# EAGLE board project (EAGLE 9.7.0)
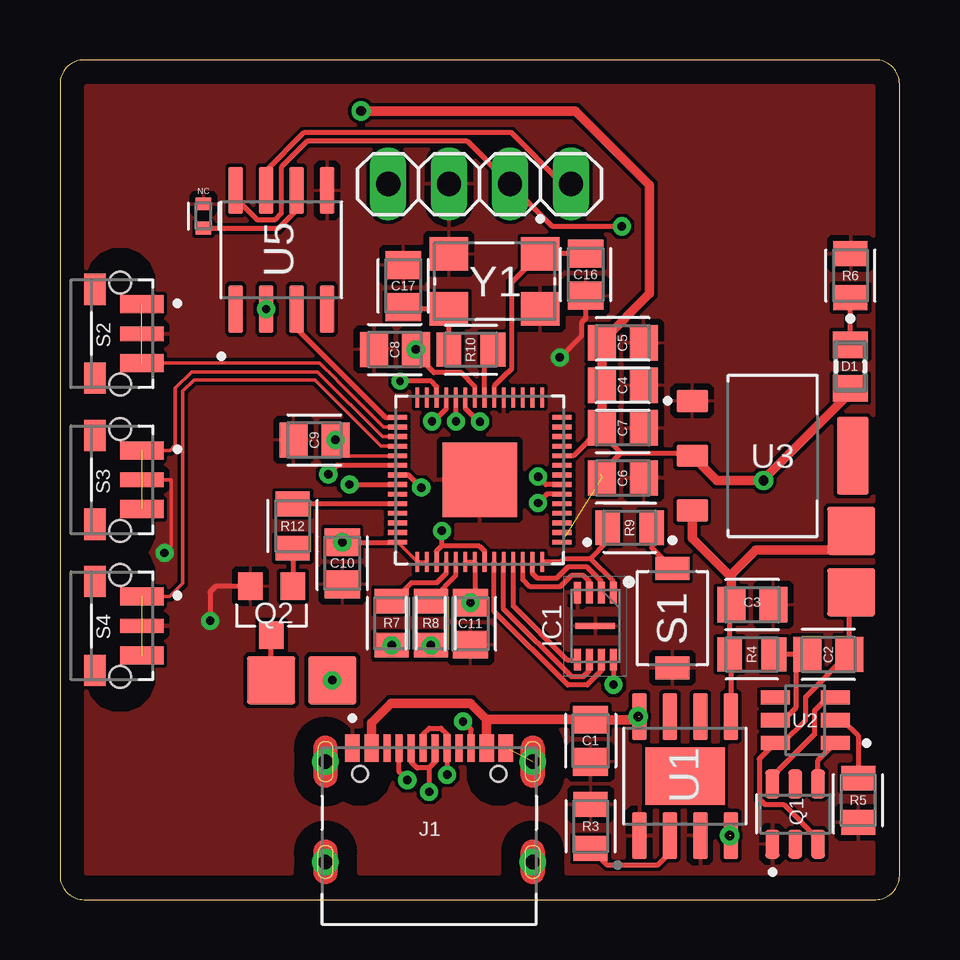
[diagram p0: board, top side]
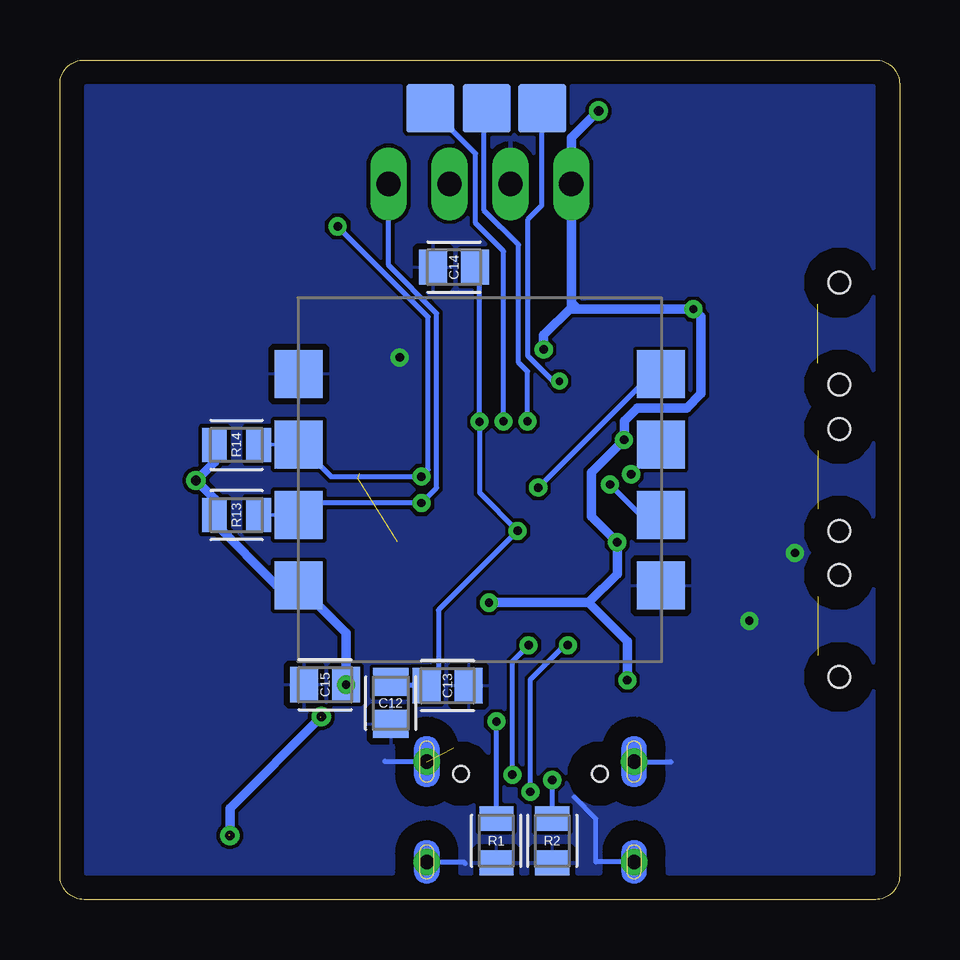
[diagram p1: board, bottom side, seen from below]

Size 35 x 35 mm. Coordinates in mm from the lower left corner, seen from the top.
Outline: 19.41,5.2 19.41,6.3 19.41,6.33 19.41,6.35 19.42,6.38 19.43,6.4 19.44,6.43 19.45,6.45 19.46,6.47 19.48,6.49 19.5,6.51 19.52,6.53 19.54,6.55 19.56,6.56 19.58,6.57 19.61,6.58 19.63,6.59 19.66,6.6 19.68,6.6 19.71,6.6 19.74,6.6 19.76,6.6 19.79,6.59 19.81,6.58 19.84,6.57 19.86,6.56 19.88,6.55 19.9,6.53 19.92,6.51 19.94,6.49 19.96,6.47 19.97,6.45 19.98,6.43 19.99,6.4 20,6.38 20,6.35 20.01,6.33 20.01,6.3 20.01,5.2 20.01,5.17 20,5.15 20,5.12 19.99,5.1 19.98,5.07 19.97,5.05 19.96,5.03 19.94,5.01 19.92,4.99 19.9,4.97 19.88,4.95 19.86,4.94 19.84,4.93 19.81,4.92 19.79,4.91 19.76,4.9 19.74,4.9 19.71,4.9 19.68,4.9 19.66,4.9 19.63,4.91 19.61,4.92 19.58,4.93 19.56,4.94 19.54,4.95 19.52,4.97 19.5,4.99 19.48,5.01 19.46,5.03 19.45,5.05 19.44,5.07 19.43,5.1 19.42,5.12 19.41,5.15 19.41,5.17 19.41,5.2
Outline: 10.77,5.2 10.77,6.3 10.77,6.33 10.78,6.35 10.78,6.38 10.79,6.4 10.8,6.43 10.81,6.45 10.82,6.47 10.84,6.49 10.86,6.51 10.88,6.53 10.9,6.55 10.92,6.56 10.94,6.57 10.97,6.58 10.99,6.59 11.02,6.6 11.04,6.6 11.07,6.6 11.1,6.6 11.12,6.6 11.15,6.59 11.17,6.58 11.2,6.57 11.22,6.56 11.24,6.55 11.26,6.53 11.28,6.51 11.3,6.49 11.32,6.47 11.33,6.45 11.34,6.43 11.35,6.4 11.36,6.38 11.37,6.35 11.37,6.33 11.37,6.3 11.37,5.2 11.37,5.17 11.37,5.15 11.36,5.12 11.35,5.1 11.34,5.07 11.33,5.05 11.32,5.03 11.3,5.01 11.28,4.99 11.26,4.97 11.24,4.95 11.22,4.94 11.2,4.93 11.17,4.92 11.15,4.91 11.12,4.9 11.1,4.9 11.07,4.9 11.04,4.9 11.02,4.9 10.99,4.91 10.97,4.92 10.94,4.93 10.92,4.94 10.9,4.95 10.88,4.97 10.86,4.99 10.84,5.01 10.82,5.03 10.81,5.05 10.8,5.07 10.79,5.1 10.78,5.12 10.78,5.15 10.77,5.17 10.77,5.2
Outline: 19.41,1.17 19.41,1.97 19.41,2 19.41,2.02 19.42,2.05 19.43,2.07 19.44,2.1 19.45,2.12 19.46,2.14 19.48,2.16 19.5,2.18 19.52,2.2 19.54,2.22 19.56,2.23 19.58,2.24 19.61,2.25 19.63,2.26 19.66,2.27 19.68,2.27 19.71,2.27 19.74,2.27 19.76,2.27 19.79,2.26 19.81,2.25 19.84,2.24 19.86,2.23 19.88,2.22 19.9,2.2 19.92,2.18 19.94,2.16 19.96,2.14 19.97,2.12 19.98,2.1 19.99,2.07 20,2.05 20,2.02 20.01,2 20.01,1.97 20.01,1.17 20.01,1.14 20,1.12 20,1.09 19.99,1.07 19.98,1.04 19.97,1.02 19.96,1 19.94,0.98 19.92,0.96 19.9,0.94 19.88,0.92 19.86,0.91 19.84,0.9 19.81,0.89 19.79,0.88 19.76,0.88 19.74,0.87 19.71,0.87 19.68,0.87 19.66,0.88 19.63,0.88 19.61,0.89 19.58,0.9 19.56,0.91 19.54,0.92 19.52,0.94 19.5,0.96 19.48,0.98 19.46,1 19.45,1.02 19.44,1.04 19.43,1.07 19.42,1.09 19.41,1.12 19.41,1.14 19.41,1.17
Outline: 10.77,1.17 10.77,1.97 10.77,2 10.78,2.02 10.78,2.05 10.79,2.07 10.8,2.1 10.81,2.12 10.82,2.14 10.84,2.16 10.86,2.18 10.88,2.2 10.9,2.22 10.92,2.23 10.94,2.24 10.97,2.25 10.99,2.26 11.02,2.27 11.04,2.27 11.07,2.27 11.1,2.27 11.12,2.27 11.15,2.26 11.17,2.25 11.2,2.24 11.22,2.23 11.24,2.22 11.26,2.2 11.28,2.18 11.3,2.16 11.32,2.14 11.33,2.12 11.34,2.1 11.35,2.07 11.36,2.05 11.37,2.02 11.37,2 11.37,1.97 11.37,1.17 11.37,1.14 11.37,1.12 11.36,1.09 11.35,1.07 11.34,1.04 11.33,1.02 11.32,1 11.3,0.98 11.28,0.96 11.26,0.94 11.24,0.92 11.22,0.91 11.2,0.9 11.17,0.89 11.15,0.88 11.12,0.88 11.1,0.87 11.07,0.87 11.04,0.87 11.02,0.88 10.99,0.88 10.97,0.89 10.94,0.9 10.92,0.91 10.9,0.92 10.88,0.94 10.86,0.96 10.84,0.98 10.82,1 10.81,1.02 10.8,1.04 10.79,1.07 10.78,1.09 10.78,1.12 10.77,1.14 10.77,1.17
Outline: 0,34 0,1 arc90 1,0 34,0 arc90 35,1 35,34 arc90 34,35 1,35 arc90 0,34
Copper layers (1*16): Top / Bottom
Stack-up Default Layer Stack: Top SilkScreen Epoxy Ink / Top SolderMask SR:Green 0.0254mm Dk 4.3 / Top Surface Finish Lead-Free 0.02mm / Top CuFoil:007 0.035mm / Dielectric-1 User Defined 1.5mm / Bottom CuFoil:007 0.035mm / Bottom Surface Finish Lead-Free 0.02mm / Bottom SolderMask SR:Green 0.0254mm Dk 4.3 / Bottom SilkScreen Epoxy Ink
Design rules: minimum copper width 6mil, minimum drill size 0.35mm, copper clearance wire_polygon to wire_polygon 6mil, copper clearance wire_polygon to pad_smd 6mil, copper clearance wire_polygon to via 6mil, copper clearance pad_smd to pad_smd 6mil, copper clearance pad_smd to via 6mil, copper clearance via to via 6mil, copper clearance smd to pad (same net) 6mil, copper clearance smd to via (same net) 6mil, copper clearance smd to smd (same net) 6mil, dimension clearance 40mil, via restrict clearance 0mil, restrict clearance 0mil, drill distance 6mil, keepout clearance 0mil

## Footprints (pad centres in the part's own frame; a part is rotated, then mirrored left to right if it is on the bottom)
SOLDER_PAD_2MM = smd 2 x 2: SP 0,0
CAPC2012X110 = smd 1.165 x 1.465: 1 -0.875,0; 2 0.875,0
LEDC2012X70N = smd 1.1 x 1.45: A 0.9,0; C -0.9,0
SON50P300X200X60-9N = smd 0.9 x 0.3: 1 -1.4,0.75; 2 -1.4,0.25; 3 -1.4,-0.25; 4 -1.4,-0.75; 5 1.4,-0.75; 6 1.4,-0.25; 7 1.4,0.25; 8 1.4,0.75 | smd 0.25 x 1.65: 9 0,0
TYPE-C(16PIN) = smd 0.6 x 1.15: A1_B12 -3.2,3.67; A4_B9 -2.4,3.67; B1_A12 3.2,3.67; B4_A9 2.4,3.67 | smd 0.3 x 1.15: A5 -1.25,3.67; A6 -0.25,3.67; A7 0.25,3.67; A8 1.25,3.67; B5 1.75,3.67; B6 0.75,3.67; B7 -0.75,3.67; B8 -1.75,3.67 | drill 0.6 pad 1: SH1 -4.32,-1.075; SH2 4.32,-1.075; SH3 -4.32,3.105; SH4 4.32,3.105 | hole 0.65: -2.89,2.605; 2.89,2.605
1X04 = drill 1.016 long: 1 -3.81,0; 2 -1.27,0; 3 1.27,0; 4 3.81,0
RESC1005X40 = smd 0.535 x 0.644: 1 -0.507,0; 2 0.507,0
SOT95P280X145-6N = smd 1.21 x 0.59: 1 -1.255,0.95; 2 -1.255,0; 3 -1.255,-0.95; 4 1.255,-0.95; 5 1.255,0; 6 1.255,0.95
SOT-23 = smd 1.016 x 1.143: 1 -0.889,-1.016; 2 0.889,-1.016; 3 0,1.016
RESC2012X65 = smd 1.031 x 1.42: 1 -0.919,0; 2 0.919,0
PUSH-4X3 = smd 0.95 x 1.4: 1 -2.075,0; 2 2.075,0
SW_SKRTLAE010 = smd 0.75 x 1.8: 1 -1.225,0.9; 3 1.225,0.9 | smd 0.6 x 1.8: 2 0,0.9 | smd 1.3 x 0.9: S1 -1.85,-1.05; S2 1.85,-1.05 | hole 0.9: -2.125,0; 2.125,0
SOP127P600X175-9N = smd 1.97 x 0.6: 1 -2.475,1.905; 2 -2.475,0.635; 3 -2.475,-0.635; 4 -2.475,-1.905; 5 2.475,-1.905; 6 2.475,-0.635; 7 2.475,0.635; 8 2.475,1.905 | smd 2.413 x 3.302: 9 0,0
AMS1117_3.3 = smd 0.93 x 1.31: 1 -2.29,-3.345; 2 0,-3.345; 3 2.29,-3.345 | smd 3.24 x 1.31: 4 0,3.345
QFN40P700X700X90-57N = smd 0.84 x 0.2: 1 -3.435,2.6; 2 -3.435,2.2; 3 -3.435,1.8; 4 -3.435,1.4; 5 -3.435,1; 6 -3.435,0.6; 7 -3.435,0.2; 8 -3.435,-0.2; 9 -3.435,-0.6; 10 -3.435,-1; 11 -3.435,-1.4; 12 -3.435,-1.8; 13 -3.435,-2.2; 14 -3.435,-2.6; 29 3.435,-2.6; 30 3.435,-2.2; 31 3.435,-1.8; 32 3.435,-1.4; 33 3.435,-1; 34 3.435,-0.6; 35 3.435,-0.2; 36 3.435,0.2; 37 3.435,0.6; 38 3.435,1; 39 3.435,1.4; 40 3.435,1.8; 41 3.435,2.2; 42 3.435,2.6 | smd 0.2 x 0.84: 15 -2.6,-3.435; 16 -2.2,-3.435; 17 -1.8,-3.435; 18 -1.4,-3.435; 19 -1,-3.435; 20 -0.6,-3.435; 21 -0.2,-3.435; 22 0.2,-3.435; 23 0.6,-3.435; 24 1,-3.435; 25 1.4,-3.435; 26 1.8,-3.435; 27 2.2,-3.435; 28 2.6,-3.435; 43 2.6,3.435; 44 2.2,3.435; 45 1.8,3.435; 46 1.4,3.435; 47 1,3.435; 48 0.6,3.435; 49 0.2,3.435; 50 -0.2,3.435; 51 -0.6,3.435; 52 -1,3.435; 53 -1.4,3.435; 54 -1.8,3.435; 55 -2.2,3.435; 56 -2.6,3.435 | smd 3.1 x 3.1: 57 0,0
SOIC127P600X175-8N = smd 1.97 x 0.59: 1 -2.475,1.905; 2 -2.475,0.635; 3 -2.475,-0.635; 4 -2.475,-1.905; 5 2.475,-1.905; 6 2.475,-0.635; 7 2.475,0.635; 8 2.475,1.905
MAX30100 = smd 2 x 2: GND1 7.544,-4.41; GND2 -7.544,4.416; INT -7.544,-4.404; IR0 -7.544,-1.464; RD -7.544,1.476; SCL 7.544,-1.47; SDA 7.544,1.47; VIN 7.544,4.41
RES-12MHZ = smd 1.4 x 1.6: 1 -1.15,1.9; 2 -1.15,-1.9; 3 1.15,-1.9; 4 1.15,1.9

## Placement (x,y rotation side)
B+  SOLDER_PAD_2MM  [SOLDER_PAD_2MM]  32.98,15.37 0 top
B-  SOLDER_PAD_2MM  [SOLDER_PAD_2MM]  32.98,12.81 0 top
C1  0.1uF  [CAPC2012X110]  22.12,6.62 90 top
C2  0.1uF  [CAPC2012X110]  32.03,10.22 0 top
C3  10uF  [CAPC2012X110]  28.86,12.29 0 top
C4  10uF  [CAPC2012X110]  23.46,21.44 0 top
C5  1uF  [CAPC2012X110]  23.46,23.21 0 top
C6  100nF  [CAPC2012X110]  23.46,17.57 0 top
C7  100nF  [CAPC2012X110]  23.46,19.67 0 top
C8  100nF  [CAPC2012X110]  13.96,22.93 180 top
C9  100nF  [CAPC2012X110]  10.61,19.16 180 top
C10  100nF  [CAPC2012X110]  11.77,14.02 270 top
C11  100nF  [CAPC2012X110]  17.11,11.5 270 top
C12  1uF  [CAPC2012X110]  21.21,8.19 270 bottom
C13  100nF  [CAPC2012X110]  18.84,8.92 0 bottom
C14  100nF  [CAPC2012X110]  18.57,26.36 180 bottom
C15  100nF  [CAPC2012X110]  23.95,8.96 180 bottom
C16  1uF  [CAPC2012X110]  21.91,26.05 270 top
C17  1uF  [CAPC2012X110]  14.31,25.58 270 top
D1  LED0805  [LEDC2012X70N]  32.95,22.22 270 top
IC1  W25Q16JVUXIQ  [SON50P300X200X60-9N]  22.32,11.4 270 top
J1  TYPE-C(16PIN)"  [TYPE-C(16PIN)]  15.39,2.64 0 top
JP1  PINHD-1X4  [1X04]  17.49,29.83 0 top
NC  [RESC1005X40]  5.98,28.49 90 top
Q1  FS8205  [SOT95P280X145-6N]  30.65,3.57 90 top
Q2  SMD-TRANSISTORS-NPN-25V-500MW(SOT-23)  [SOT-23]  8.82,12.04 180 top
R1  5.1K  [RESC2012X65]  16.81,2.45 270 bottom
R2  5.1k  [RESC2012X65]  14.48,2.45 90 bottom
R3  1.2K  [RESC2012X65]  22.12,3.05 90 top
R4  100  [RESC2012X65]  28.84,10.22 0 top
R5  1K  [RESC2012X65]  33.27,4.14 270 top
R6  100  [RESC2012X65]  32.95,26.01 270 top
R7  100  [RESC2012X65]  13.83,11.52 90 top
R8  100  [RESC2012X65]  15.46,11.52 270 top
R9  100  [RESC2012X65]  23.75,15.5 180 top
R10  1K  [RESC2012X65]  17.13,22.92 180 top
R12  330  [RESC2012X65]  9.7,15.57 270 top
R13  4.7K  [RESC2012X65]  27.64,16.03 0 bottom
R14  4.7K  [RESC2012X65]  27.64,18.95 180 bottom
S1  PUSH-4X3  [PUSH-4X3]  25.53,11.73 270 top
S2  SKRTLAE010  [SW_SKRTLAE010]  2.52,23.59 270 top
S3  SKRTLAE010  [SW_SKRTLAE010]  2.52,17.5 270 top
S4  SKRTLAE010  [SW_SKRTLAE010]  2.52,11.41 270 top
SP1  SOLDER_PAD_2MM  [SOLDER_PAD_2MM]  14.9,32.98 180 bottom
SP2  SOLDER_PAD_2MM  [SOLDER_PAD_2MM]  19.56,32.98 180 bottom
SP3  SOLDER_PAD_2MM  [SOLDER_PAD_2MM]  17.21,32.98 180 bottom
SP4  SOLDER_PAD_2MM  [SOLDER_PAD_2MM]  8.8,9.14 0 top
SP5  SOLDER_PAD_2MM  [SOLDER_PAD_2MM]  11.35,9.14 0 top
U1  TP4056  [SOP127P600X175-9N]  26.06,5.15 90 top
U2  DW01A  [SOT95P280X145-6N]  31.07,7.48 180 top
U3  AMS1117_3.3  [AMS1117_3.3]  29.7,18.5 270 top
U4  RP2040  [QFN40P700X700X90-57N]  17.5,17.5 180 top
U5  DS3231MZ+  [SOIC127P600X175-8N]  9.23,27.09 90 top
U$1  MAX30100MAX30100  [MAX30100]  17.5,17.5 180 bottom
Y1  RES-12MHZ  [RES-12MHZ]  18.11,25.77 270 top

## Library data of the parts
B+ B- SP1-SP5 = SOLDER PAD
C1-C17 = Capacitor; CATEGORY: Capacitor; PACKAGE_SIZE: 0805; PACKAGE_TYPE: Surface Mount; SUBCATEGORY: Ceramic Capacitors; TYPE: MLCC
D1 = LED 0805; AVAILABILITY: In Stock; CHECK_PRICES: https://www.snapeda.com/parts/597-3305-607F/Dialight/view-part/?ref=eda; DESCRIPTION: SMD LED 0805 G 7 | Dialight 597-3305-607F; MF: Dialight; MP: 597-3305-607F; PACKAGE: 0805 Dialight; PRICE: None; PURCHASE-URL: https://www.snapeda.com/api/url_track_click_mouser/?unipart_id=561918&manufacturer=Dialight&part_name=597-3305-607F&search_term=led 0805; SNAPEDA_LINK: https://www.snapeda.com/parts/597-3305-607F/Dialight/view-part/?ref=snap
IC1 = W25Q16JVUXIQ; AVAILABILITY: In Stock; CHECK_PRICES: https://www.snapeda.com/parts/W25Q16JVUXIQ/Winbond/view-part/?ref=eda; DESCRIPTION: NOR Flash Serial (SPI, Dual SPI, Quad SPI) 3V/3.3V 16M-bit 2M x 8 6ns 8-Pin USON EP T/R; MF: Winbond; MP: W25Q16JVUXIQ; PACKAGE: UFDFN-8 Winbond; PRICE: None; SNAPEDA_LINK: https://www.snapeda.com/parts/W25Q16JVUXIQ/Winbond/view-part/?ref=snap
J1 = TYPE-C USB; AVAILABILITY: Not in stock; CHECK_PRICES: https://www.snapeda.com/parts/TYPE-C%2016PIN%202MD%20(073)/Shouhan/view-part/?ref=eda; DESCRIPTION: DC-5V 5A Type C USB; MF: Shouhan; MP: TYPE-C(16PIN); PACKAGE: Package; PRICE: None; SNAPEDA_LINK: https://www.snapeda.com/parts/TYPE-C%2016PIN%202MD%20(073)/Shouhan/view-part/?ref=snap
JP1 = Connector; CATEGORY: Connectors; DESCRIPTION: Header-Straight-4 Position; PACKAGE_TYPE: Through Hole; PITCH: 0.100" (2.54mm); SUBCATEGORY: Headers; TYPE: Male Pins
NC = Resistor; CATEGORY: Resistors; DESCRIPTION: Chip Resistor 1.05 X 0.54 X 0.40 mm body 0402(1005-METRIC) Package; PACKAGE_SIZE: 0402; PACKAGE_TYPE: Surface Mount
Q1 = FS8205; AVAILABILITY: In Stock; CHECK_PRICES: https://www.snapeda.com/parts/FS8205/Fortune+Semiconductor/view-part/?ref=eda; DESCRIPTION: Dual N-Channel Enhancement Mode Power MOSFET; MF: Fortune Semiconductor; MP: FS8205; PACKAGE: Package; PRICE: None; SNAPEDA_LINK: https://www.snapeda.com/parts/FS8205/Fortune+Semiconductor/view-part/?ref=snap
Q2 = S8050; AVAILABILITY: In Stock; CHECK_PRICES: https://www.snapeda.com/parts/S8050/MDD/view-part/?ref=eda; DESCRIPTION: Bipolar (BJT) Transistor NPN 25 V 500 mA 150MHz 300 mW Surface Mount SOT-23; MF: MDD; MP: S8050; PACKAGE: None; PRICE: None; SNAPEDA_LINK: https://www.snapeda.com/parts/S8050/MDD/view-part/?ref=snap
R1-R10 R12-R14 = Resistor; CATEGORY: Resistors; DESCRIPTION: Chip Resistor 2.00 X 1.25 X 0.65 mm body 0805(2012-METRIC) Package; PACKAGE_SIZE: 0805; PACKAGE_TYPE: Surface Mount
S1 = PUSH 4x3mm; AVAILABILITY: In Stock; CHECK_PRICES: https://www.snapeda.com/parts/TL1015AF160QG/E-Switch/view-part/?ref=eda; DESCRIPTION: Tactile Switch SPST-NO Top Actuated Surface Mount; MF: E-Switch; MP: TL1015AF160QG; PACKAGE: None; PRICE: None; SNAPEDA_LINK: https://www.snapeda.com/parts/TL1015AF160QG/E-Switch/view-part/?ref=snap
S2-S4 = PUSH LATERAL; AVAILABILITY: In Stock; CHECK_PRICES: https://www.snapeda.com/parts/SKRTLAE010/ALPS/view-part/?ref=eda; DESCRIPTION: Switch Tactile N.O. SPST Round Button J-Bend 0.05A 12VDC 1.6N SMD Embossed Tape; MF: ALPS; MP: SKRTLAE010; PACKAGE: None; PRICE: None; PURCHASE-URL: https://www.snapeda.com/api/url_track_click_mouser/?unipart_id=696622&manufacturer=ALPS&part_name=SKRTLAE010&search_term=alps skrp tactile switch; SNAPEDA_LINK: https://www.snapeda.com/parts/SKRTLAE010/ALPS/view-part/?ref=snap
U1 = TP4056; AVAILABILITY: Not in stock; CHECK_PRICES: https://www.snapeda.com/parts/TP4056/NanJing+Top+Power+ASIC+Corp./view-part/?ref=eda; DESCRIPTION: Complete single cell Li-Ion battery with a constant current / constant voltage linear charger; MF: NanJing Top Power ASIC Corp.; MP: TP4056; PACKAGE: Package; PRICE: None; SNAPEDA_LINK: https://www.snapeda.com/parts/TP4056/NanJing+Top+Power+ASIC+Corp./view-part/?ref=snap
U2 = DW01A; AVAILABILITY: Not in stock; CHECK_PRICES: https://www.snapeda.com/parts/DW01A/Fortune+Semiconductor/view-part/?ref=eda; DESCRIPTION: One Cell Lithium-ion/Polymer Battery Protection IC; MF: Fortune Semiconductor; MP: DW01A; PACKAGE: SOT-23-6 Fortune Semiconductor; PRICE: None; SNAPEDA_LINK: https://www.snapeda.com/parts/DW01A/Fortune+Semiconductor/view-part/?ref=snap
U3 = VOL REGS; AVAILABILITY: In Stock; CHECK_PRICES: https://www.snapeda.com/parts/AMS1117-3.3/UMW/view-part/?ref=eda; DESCRIPTION: Linear Voltage Regulator IC Positive Fixed 1 Output 1A SOT-223-3L; MF: UMW; MP: AMS1117-3.3; PACKAGE: SOT-223-3L UMW; PRICE: None; SNAPEDA_LINK: https://www.snapeda.com/parts/AMS1117-3.3/UMW/view-part/?ref=snap
U4 = RP2040; AVAILABILITY: In Stock; CHECK_PRICES: https://www.snapeda.com/parts/RP2040/Raspberry+Pi/view-part/?ref=eda; DESCRIPTION: RP2040 chip for Raspberry Pi Pico - ARM® Cortex®-M0+ MCU 32-Bit; MF: Raspberry Pi; MP: RP2040; PACKAGE: None; PRICE: None; PURCHASE-URL: https://www.snapeda.com/api/url_track_click_mouser/?unipart_id=5800506&manufacturer=Raspberry Pi&part_name=RP2040&search_term=rp2040; SNAPEDA_LINK: https://www.snapeda.com/parts/RP2040/Raspberry+Pi/view-part/?ref=snap
U5 = DS3231MZ; AVAILABILITY: In Stock; CHECK_PRICES: https://www.snapeda.com/parts/DS3231MZ+/Analog+Devices/view-part/?ref=eda; DESCRIPTION: ±5ppm, I2C Real-Time Clock; MF: Analog Devices; MP: DS3231MZ+; PACKAGE: SOIC-8 Maxim; PRICE: None; SNAPEDA_LINK: https://www.snapeda.com/parts/DS3231MZ+/Analog+Devices/view-part/?ref=snap
U$1 = MAX30100
Y1 = RESONATORS; AVAILABILITY: In Stock; CHECK_PRICES: https://www.snapeda.com/parts/C5S-12.000-16-3030-X-R/Aker/view-part/?ref=eda; DESCRIPTION: Crystal, 5.00mm x3.20mm,12MHz,16pF,-40-85C; MF: Aker Technology USA; MP: C5S-12.000-16-3030-X-R; PACKAGE: SMD-4 AKER; PRICE: None; SNAPEDA_LINK: https://www.snapeda.com/parts/C5S-12.000-16-3030-X-R/Aker/view-part/?ref=snap

## Nets
1.1V: C12.1 C13.1 C14.1 U4.23 U4.45 U4.50
3.3V: C4.1 C5.1 C6.1 C7.1 C8.1 C9.1 C10.1 C11.1 C15.1 D1.A IC1.8 JP1.1 R13.1 R14.2 SP5.SP U3.2 U4.1 U4.10 U4.22 U4.33 U4.42 U4.43 U4.44 U4.48 U4.49 U5.2 U$1.VIN
5.0V: C1.2 J1.A4_B9 J1.B4_A9 U1.4 U1.8
B-: B-.SP C2.2 Q1.3 U2.6
DNEG: J1.A7 J1.B7 R7.1
DPOS: J1.A6 J1.B6 R8.2
GND: C1.1 C3.2 C4.2 C5.2 C6.2 C7.2 C8.2 C9.2 C10.2 C11.2 C12.2 C13.2 C14.2 C15.2 C16.2 C17.1 IC1.4 IC1.9 J1.A1_B12 J1.B1_A12 J1.SH1 J1.SH2 J1.SH3 J1.SH4 JP1.2 NC.2 Q1.1 Q2.2 R1.2 R2.1 R3.2 R5.2 R6.1 S1.2 S2.2 S3.2 S4.2 U1.1 U1.3 U3.1 U4.19 U4.57 U5.5 U$1.GND1 U$1.GND2 Y1.2 Y1.4
INT: U4.35 U$1.INT
IR: U4.34 U$1.IR0
N$1: R3.1 U1.2
N$2: D1.C R6.2
N$3: R7.2 U4.46
N$4: J1.A5 R2.2
N$5: J1.B5 R1.1
N$6: R8.1 U4.47
N$7: IC1.5 U4.53
N$8: R5.1 U2.2
N$9: Q1.6 U2.3
N$10: Q1.4 U2.1
N$11: C2.1 R4.2 U2.5
N$12: IC1.6 U4.52
N$13: IC1.2 U4.55
N$14: IC1.3 U4.54
N$15: IC1.7 U4.51
N$16: R9.1 S1.1
N$17: SP1.SP U4.26
N$18: SP2.SP U4.24
N$19: SP3.SP U4.25
N$20: R10.1 U4.21
N$21: C17.2 R10.2 Y1.3
N$22: C16.1 U4.20 Y1.1
N$23: Q2.1 R12.2
N$24: Q2.3 SP4.SP
N$32: NC.1 U5.6
OUT: B+.SP C3.1 R4.1 U1.5 U3.3
PSH1: S2.1 S2.3 U4.30
PSH2: S3.1 S3.3 U4.31
PSH3: S4.1 S4.3 U4.32
RD: U4.36 U$1.RD
RST: IC1.1 R9.2 U4.56
SCL: JP1.3 R14.1 U4.7 U5.8 U$1.SCL
SDA: JP1.4 R13.2 U4.6 U5.7 U$1.SDA
SQW: U4.29 U5.3
TRAN: R12.1 U4.38

## Tracks (layer width: path | path; a pad name or v marks a point on that pad's centre or on a via)
1.1V  (via drill 0.35 pad 0.5)
  Top 0.2: U4.45 15.7,14.53 15.91,14.74 15.92,14.74 | U4.50 17.7,14.53 17.49,14.74 15.92,14.74 | 15.92,14.74 v15.92,15.37 | v17.51,19.92 17.45,19.92 16.9,20.47 U4.23
  Bottom 0.2: C12.1 21.06,8.92 C13.1 19.23,9.41 19.23,12.07 v15.92,15.37 17.51,16.96 v17.51,19.92 | C14.1 17.51,26.18 v17.51,19.92 | v17.51,19.92
3.3V  (via drill 0.35, 0.35 pad 0.5, 0.4 pad 0.6)  (3 unrouted)
  Top 0.152: U3.2 | U4.1 | U4.22 | U4.33 12.04,18.5 11.48,19.05 C9.1 | U4.43 | U4.42 U4.43 | U4.43 U4.44
  Top 0.2: IC1.8 C15.1 | 23.39,18.62 22.59,19.43 C7.1 22.57,19.67 21.4,18.5 U4.10 | 23.39,18.62 23.4,18.61 26.24,18.61 U3.2 | 23.39,18.62 22.52,17.76 | C10.1 U4.42 | U4.48 U4.49 17.3,12.56 C11.1 | U4.22 17.3,21.39 16.74,21.96 15.59,21.96 14.84,22.71 C8.1
  Top 0.4: U3.2 27.39,17.47 v29.33,17.47 29.33,17.51 32.95,21.13 D1.A | C7.1 C4.1 C5.1 22.59,23.27 24.57,25.26 24.57,29.79 21.49,32.87 v12.55,32.87
  Bottom 0.4: C11.1 12.97,12.38 | R14.2 28.56,18.24 v29.33,17.47 v29.32,17.47 28.56,16.71 R13.1 28.56,15.69 25.96,13.09 U$1.VIN 23.07,11.12 C15.1 | JP1.1 13.68,24.89 | 13.68,24.89 13.68,24.69 | 13.68,24.69 13.68,24.62 13.41,24.62 | 13.41,24.62 13.29,24.62 U5.2 8.27,24.29 8.27,21.09 8.86,20.5 10.92,20.5 11.48,19.94 11.48,19.17 C9.1 12.84,17.8 12.84,15.96 C10.1 11.77,13.57 12.97,12.38 | JP1.1 13.68,30.22 | 13.68,24.69 14.84,23.53 C8.1 | 12.97,12.38 11.35,10.75 SP5.SP | 13.41,24.62 13.68,24.89 | v12.55,32.87 12.57,32.87 13.68,31.76 JP1.1
  other vias: 11.49,19.16 17.12,12.38 23.07,8.96 8.59,24.61 11.77,14.9 14.84,22.93 11.35,9.14
5.0V  (via drill 0.4 pad 0.6)  (2 unrouted)
  Top 0.4: 13,6.32 J1.A4_B9 12.99,7.37 13.8,8.18 17.12,8.18 17.79,7.51 | J1.B4_A9 17.79,7.51 | 17.79,7.51 C1.2 24.03,7.5 U1.8
  Bottom 0.4: v24.11,7.62 27.91,3.81 v27.91,2.67
B-
  Top 0.2: C2.2 32.91,12.19 32.98,12.27 B-.SP | 32.83,10.22 C2.2 | C2.2 32.85,10.22 31.09,8.45 31.09,7.49 30.12,6.53 U2.6 29.15,5.86 29.15,4.2 29.39,3.96 30.18,3.96 31.6,2.54 Q1.3
DNEG  (via drill 0.35, 0.35 pad 0.5)
  Top 0.2: 15.39,5.49 15.64,5.73 J1.A7 | 15.39,5.49 14.88,5.49 14.64,5.73 J1.B7 | 15.39,5.49 v15.39,4.49
  Bottom 0.2: v15.39,4.49 15.39,9.17 13.96,10.6 R7.1
  other vias: 13.83,10.6
DPOS  (via drill 0.35, 0.35 pad 0.5)
  Top 0.2: J1.A6 15.14,6.9 15.38,7.14 15.89,7.14 16.14,6.9 J1.B6 v16.14,5.2
  Bottom 0.2: v16.14,5.2 16.14,9.93 15.47,10.6 R8.2
  other vias: 15.46,10.6
GND  (via drill 0.35)  (1 unrouted)
  Top 0.152: S3.2 4.63,17.5 4.64,17.49 4.64,14.73 v4.36,14.45
  Top 0.2: v20.84,22.6 21.75,23.51 21.75,24.05 21.91,24.21 C16.2 | Q2.2 6.5,13.06 6.26,12.82 v6.26,11.62
  Bottom 0.2: J1.SH2 18.17,1.57 18.11,1.51 | J1.SH1 12.66,1.57 12.66,3.37 13.56,4.27 | J1.SH3 9.55,5.75 9.53,5.73 | J1.SH4 21.43,5.75 21.45,5.77
  pour Top: 36,36 -1,36 -1,-1 36,-1
  pour Bottom: 36,36 -1,36 -1,-1 36,-1
INT  (via drill 0.35 pad 0.5)
  Top 0.2: U4.35 14.52,17.7 v15.06,17.17
  Bottom 0.2: v15.06,17.17 10.33,21.9 U$1.INT
IR  (via drill 0.35 pad 0.5)
  Top 0.2: U4.34 11.56,18.1 v11.19,17.73
  Bottom 0.152: U$1.IR0 v11.19,17.73
N$1
  Top 0.2: U1.2 25.43,1.94 24.92,1.43 22.82,1.43 R3.1
N$2
  Top 0.152: R6.2
  Top 0.2: D1.C R6.2
N$3
  Top 0.152: U4.46 16.1,13.63 | R7.2 13.87,12.4
  Top 0.2: U4.46 16.1,13.6 15.7,13.21 14.65,13.21 13.88,12.44 R7.2
N$4  (via drill 0.35 pad 0.5)
  Top 0.2: J1.A5 14.14,5.32 v14.48,4.98
  Bottom 0.2: v14.48,4.98 R2.2
N$5  (via drill 0.35 pad 0.5)
  Top 0.2: J1.B5 17.14,7.09 v16.81,7.42 v16.8,7.42
  Bottom 0.2: v16.8,7.42 v16.81,7.41 R1.1
N$6
  Top 0.152: 15.51,12.62 15.46,12.62 R8.1
  Top 0.2: 15.51,12.62 15.61,12.62 16.5,13.5 U4.47
N$7
  Top 0.2: U4.53 18.9,12.23 21.13,10 IC1.5
N$8
  Top 0.2: U2.2 32.63,7.47 33.27,6.83 R5.1
N$9
  Top 0.2: Q1.6 29.7,5.13 31.47,6.9 31.47,7.88 32.02,8.43 U2.3
N$10
  Top 0.2: Q1.4 31.6,5.8 U2.1
N$11
  Top 0.2: U2.5 30.16,7.48 30.67,7.99 30.67,9.74 C2.1 R4.2
N$12
  Top 0.2: IC1.6 22.07,9.54 21.82,9.3 21.32,9.3 18.5,12.11 U4.52
N$13
  Top 0.2: IC1.2 22.57,13.25 21.97,13.86 21.17,13.86 20.71,13.39 19.91,13.39 19.7,13.6 U4.55
N$14
  Top 0.2: U4.54 19.3,13.34 19.6,13.04 20.85,13.04 21.32,13.5 21.82,13.5 22.07,13.26 IC1.3
N$15
  Top 0.2: IC1.7 22.57,9.54 21.97,8.95 21.17,8.95 18.1,12.02 U4.51
N$16
  Top 0.2: R9.1 24.67,14.67 S1.1
N$17  (via drill 0.3)
  Top 0.2: U4.26 15.7,21.39 15.49,21.61 v14.18,21.61
  Bottom 0.2: v14.18,21.61 14.45,21.61 15.51,22.67 15.51,28.34 14.93,28.93 14.93,32.96 SP1.SP
N$18  (via drill 0.35)
  Top 0.2: U4.24 16.5,19.94 v16.51,19.93
  Bottom 0.2: v16.51,19.93 16.51,27.03 17.68,28.2 17.68,31.1 SP2.SP
N$19  (via drill 0.35)
  Top 0.2: U4.25 16.1,20.45 15.59,19.94 v15.51,19.94
  Bottom 0.2: v15.51,19.94 15.51,22.02 15.88,22.39 15.88,27.29 17.31,28.73 17.31,32.88 SP3.SP
N$20
  Top 0.2: U4.21 17.7,22.57 R10.1
N$21
  Top 0.2: R10.2 Y1.3 14.4,24.62 C17.2
N$22
  Top 0.2: C16.1 Y1.1 18.82,25.72 18.82,22.11 18.67,21.96 18.66,21.96 18.1,21.4 U4.20
N$23
  Top 0.2: R12.2 Q2.1
N$24
  Top 0.2: SP4.SP 8.8,11 Q2.3
N$32
  Top 0.2: U5.6 9.86,28.73 9.1,27.97 NC.1
OUT
  Top 0.2: U1.5 27.96,10.17 R4.1 27.92,12.23 C3.1
  Top 0.4: C3.1 27.98,13.55 | U3.3 26.36,15.05 27.92,13.49 27.98,13.55 | 27.98,13.55 29,14.57 32.18,14.57 B+.SP
PSH1  (1 unrouted)
  Top 0.152: 13.63,19.7 U4.30 13.49,19.7 11.58,21.61 11.5,21.69 10.82,22.37 10.64,22.37 S2.3
PSH2  (1 unrouted)
  Top 0.152: U4.31 13.44,19.3 10.74,22 5.48,22 4.81,21.33 4.81,18.94 4.59,18.72 S3.1
PSH3  (1 unrouted)
  Top 0.152: U4.32 13.38,18.9 10.63,21.65 5.58,21.65 5.12,21.19 5.12,13.17 4.58,12.63 S4.1
RD  (via drill 0.35)
  Top 0.2: v12.07,17.3 U4.36
  Bottom 0.2: v12.07,17.3 10.79,16.02 U$1.RD
RST
  Top 0.2: IC1.1 23.07,13.25 22.12,14.21 | U4.56 20.88,14.06 21.02,14.21 22.12,14.21 | 22.12,14.21 22.83,14.92 R9.2
SCL  (via drill 0.35)
  Top 0.2: U4.7 20.26,17.3 v19.93,17.63 | U5.8 7.32,29.24 8.24,28.33 8.95,28.33 9.23,28.6 9.23,30.52 10.31,31.61 16.98,31.61 JP1.3 20.54,28.05 v23.41,28.05 v23.42,28.06
  Bottom 0.152: 25.02,18.97 U$1.SCL 26.71,18.97 R14.1
  Bottom 0.2: U$1.SCL 23.7,17.63 v19.93,17.63 19.65,17.91 19.65,24.29 v23.42,28.06
SDA  (via drill 0.35)
  Top 0.2: U4.6 20.3,16.9 v19.93,16.53 | U5.7 8.6,30.39 10.17,31.96 18.83,31.96 20.96,29.83 JP1.4
  Bottom 0.152: U$1.SDA R13.2
  Bottom 0.2: U$1.SDA 24.54,16.53 v19.93,16.53 19.3,17.16 19.3,24.44 21.3,26.44 JP1.4
SQW
  Top 0.2: U5.3 9.86,23.8 13.57,20.1 U4.29
TRAN
  Top 0.2: U4.38 R12.1